# Altium PCB pipe_sim_pcb.PcbDoc
Units mm, origin at the board's own origin, x right, y up, seen from the top; angles counter-clockwise.
Board outline 26 x 14 mm, 2 copper layers (Top Layer, Bottom Layer); 4 components, 5 nets, 16 pads, 0 vias.
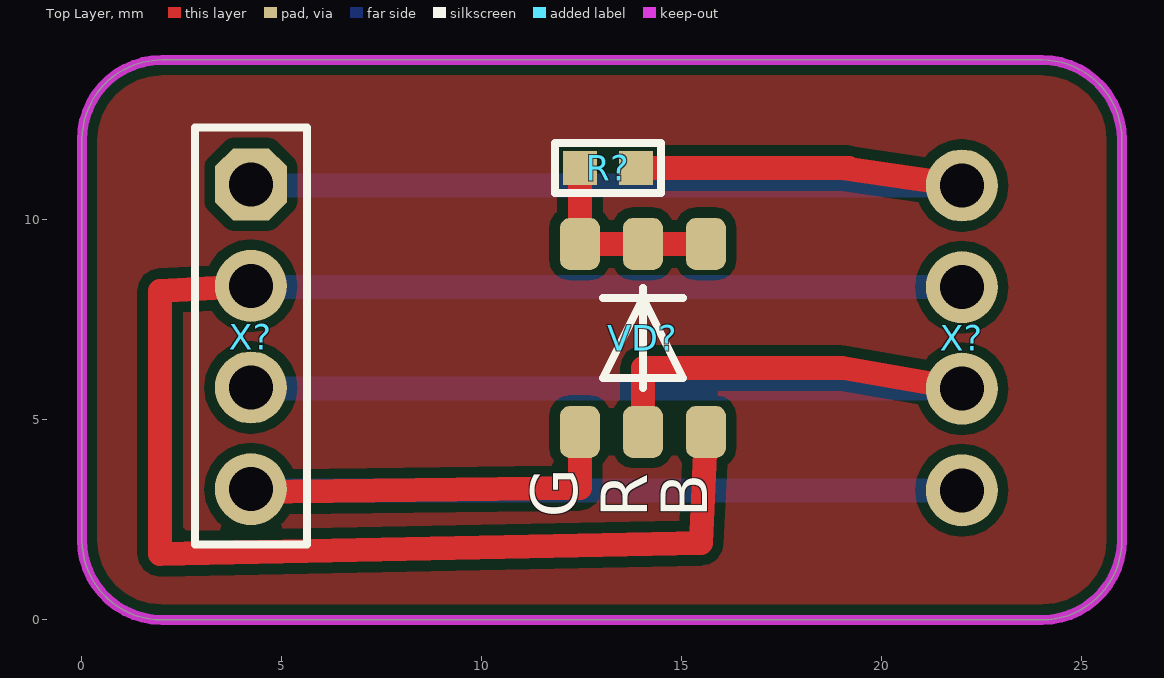
[diagram p0: Top Layer view]
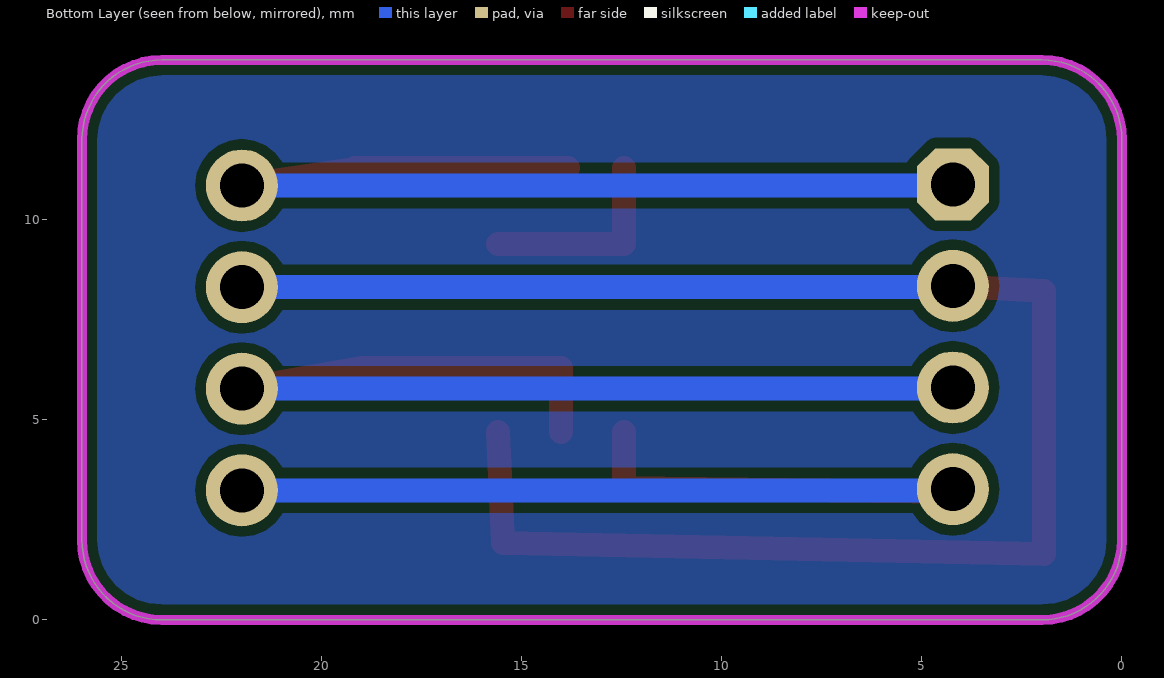
[diagram p1: Bottom Layer view, seen from below]

## Layer stack, top to bottom
Top Solder: solder mask 0.0102, Solder Resist, Dk 3.5
Top Layer: signal copper 0.0356
Dielectric 1: dielectric 0.32, FR-4, Dk 4.8
Bottom Layer: signal copper 0.0356
Bottom Solder: solder mask 0.0102, Solder Resist, Dk 3.5

## Board outline
2,0 cw(c2,2) 0,2 0,12 cw(c2,12) 2,14 24,14 cw(c24,12) 26,12 26,2 cw(c24,2) 24,0

## Design rules (kind name [scope] priority, off if disabled: settings)
Clearance [All] p1: gap=0.254 ignorepadtopadclearanceinfootprint=FALSE except(0: Arc-Hole Track-Hole SMDPad-Hole THPad-Hole Via-Hole Fill-Hole Poly-Hole Region-Hole Text-Hole)
PolygonConnect [All] p1: thpad.connectstyle=Relief thpad.reliefconductorwidth=0.5 thpad.reliefentries=4 thpad.polygonreliefangle="90 Angle" thpad.airgapwidth=0.4 smdpad.connectstyle=Relief smdpad.reliefconductorwidth=0.5 smdpad.reliefentries=4 smdpad.polygonreliefangle="90 Angle" smdpad.airgapwidth=0.5 via.connectstyle=Relief via.reliefconductorwidth=0.254 via.reliefentries=4 via.polygonreliefangle="90 Angle" via.airgapwidth=0.254
RoutingVias [All] p1: holewidth=0.711 width=1.27 viastyle="Through Hole" minholewidth=0.711 minwidth=1.27 maxholewidth=0.711 maxwidth=1.27
SolderMaskExpansion [All] p1: expansion=0.102
Width [All] p1: maxlimit=2 minlimit=0.254 preferedwidth=0.75
30 further rules are at their usual default settings.

## Classes and differential pairs
component class pipe_sim_schematic: R? VD? X?

## Components (designator, comment, footprint, x,y, rotation, side; value= is the part's Value field where it differs from the comment)
R? "Resistor film, 100R, ±5%, 0603, 0.1W, -55...+125°C" "RES: 0603" 13.15,11.3 r0 top value=100R
VD? "VD?" RGB 14.025,7.05 r90 top
X? "Connector, 4pin, 2.54mm, 500VAC, 3A" "CON: PBS-4 R" 4.225,7.08 r270 top
X? "Connector, 4pin, 2.54mm, 500VAC, 3A" "4PLS RIGHT ANGLE 2" 22,7.05 r270 top

## Footprints (in the part's own frame and the unit in brackets; to place one, negate y for a bottom-side part, rotate by r counter-clockwise, add the part's x,y. Pads: shape width x height; smd on the part's side, far side on the other; paste and mask are expansions set on the pad)
"4PLS RIGHT ANGLE 2" [mm]
  round 1.8 hole 1.1: 1(-3.81,0) 2(-1.27,0) 3(1.27,0) 4(3.81,0)
  body extent -5.04,-0.32 5.14,10.04, height 2.57
"CON: PBS-4 R" [mm] "PBS-5"
  oct 1.8x1.8 hole 1.1: 1(-3.81,0)
  round 1.8 hole 1.1: 2(-1.27,0) 3(1.27,0) 4(3.81,0)
  silkscreen extent -5.23,-1.4 5.2,1.4, body extent -5.08,-10.2 5.08,0, height 2.54
"RES: 0603" [mm]
  rect 0.85x0.85 smd: 1(-0.7,0) 2(0.7,0)
  silkscreen extent -1.33,-0.63 1.33,0.63, body extent -0.8,-0.4 0.8,0.4, height 0.44
RGB [mm]
  rrect50% 1.3x1 smd: 1(2.35,1.575) 2(2.35,0) 3(2.35,-1.575) 4(-2.35,1.575) 5(-2.35,0) 6(-2.35,-1.575)
  silkscreen extent -1.25,-1 1.25,1, body extent -1.8,-1.75 1.8,1.75, height 2.01

## Part data
R?: library part Resistor_0603, Manufacturer=Yageo, Package=0603, PartNumber=RC0603JR-07100RL, Power=0.1W, Temperature=-55...+125°C, Tolerance=±5%, TypeResistor="Resistor film", HelpURL=https://www.digikey.com/product-detail/en/yageo/RC0603JR-07100RL/311-100GRCT-ND/729644, ValueManufacturerPartNumber="Resistor film, 100R, ±5%, 0603, 0.1W, -55...+125°C"
VD?: library part RGB
X?: library part PBS-4, CurrentMax=3A, Manufacturer=Connfly, VoltageMax=500VAC, CommentText=Output, HelpURL=https://www.chipdip.ru/product/pbs-4, Multichannel=4pin, PartNumber=PBS-4, Pitch=2.54mm, TypeConnector=Connector, ValueManufacturerPartNumber="Connector, 4pin, 2.54mm, 500VAC, 3A"
X?: library part PLS-4, CurrentMax=3A, Manufacturer=Connfly, VoltageMax=500VAC, CommentText=Input, HelpURL=https://www.chipdip.ru/product/pls-4, Multichannel=4pin, PartNumber=PLS-4, Pitch=2.54mm, TypeConnector=Connector, ValueManufacturerPartNumber="Connector, 4pin, 2.54mm, 500VAC, 3A"

## Nets (pads, with @x,y where several pads share a name; then routed paths per layer and width w, separated by ;. In a path a pad name is that pad's centre, name@x,y a point inside that pad or via, vN(x,y) a via of type N, cw(c..) or ccw(c..) an arc to the next point about the centre after c; other vN are vias at no path point)
GND: R?.2 X?.1 | length 26.1
  Top Layer w0.6: R?.2 19,11.3 ; 19.175,11.3 19,11.3 ; X?.1@22,10.86 19,11.3
  Bottom Layer w0.6: X?.1@4.225,10.86 X?.1@22,10.86
NetR?_1: R?.1 VD?.1 VD?.2 VD?.3 | length 5.1
  Top Layer w0.6: R?.1 VD?.1 VD?.2 VD?.3
NetVD?_4: VD?.4 X?.4 | length 27.4
  Top Layer w0.6: X?.4@4.226,3.194 12.45,3.3 VD?.4
  Bottom Layer w0.6: X?.4@4.225,3.24 X?.4@22,3.24
NetVD?_5: VD?.5 X?.3 | length 27.4
  Top Layer w0.6: VD?.5 14.025,6.3 19,6.3 X?.3@22,5.78
  Bottom Layer w0.6: X?.3@4.225,5.78 X?.3@22,5.78
NetVD?_6: VD?.6 X?.2 | length 42.9
  Top Layer w0.6: X?.2@4.225,8.35 1.95,8.225 1.95,1.65 15.475,1.925 VD?.6
  Bottom Layer w0.6: X?.2@4.225,8.32 X?.2@22,8.32

## Polygon pours and split planes (outlines as drawn)
no net on Top Layer "Top Layer-No Net" (solid, pour order 8): 2,0 cw(c2,2) 0,2 0,12 cw(c2,12) 2,14 24,14 cw(c24,12) 26,12 26,2 cw(c24,2) 24,0
no net on Top Layer "Top Layer-NetJ1_1" (solid, pour order 4): 24.4,3
no net on Bottom Layer "Top Layer-No Net1" (solid, pour order 9): 2,0 cw(c2,2) 0,2 0,12 cw(c2,12) 2,14 24,14 cw(c24,12) 26,12 26,2 cw(c24,2) 24,0

## Keep-outs
Keep-Out Layer:
  the board outline again, w0.254

## Text inside footprints (layer, text, board x,y; h text height)
VD?: Top Overlay "G" at 12.775,2.55 h2 r90; Top Overlay "R" at 14.525,2.55 h2 r90; Top Overlay "B" at 16.025,2.55 h2 r90